# Altium PCB New_LXe_twr.PcbDoc (part 4 of 5)
Units mm, origin at the board's own origin, x right, y up, seen from the top; angles counter-clockwise.
Board outline 130 x 150 mm, 6 copper layers (Top Layer, Internal Plane 1, MidLayer1, MidLayer2, Internal Plane 2, Bottom Layer); 673 components, 504 nets, 5569 pads, 803 vias.
Unrouted connection lines stored in the file: 633.
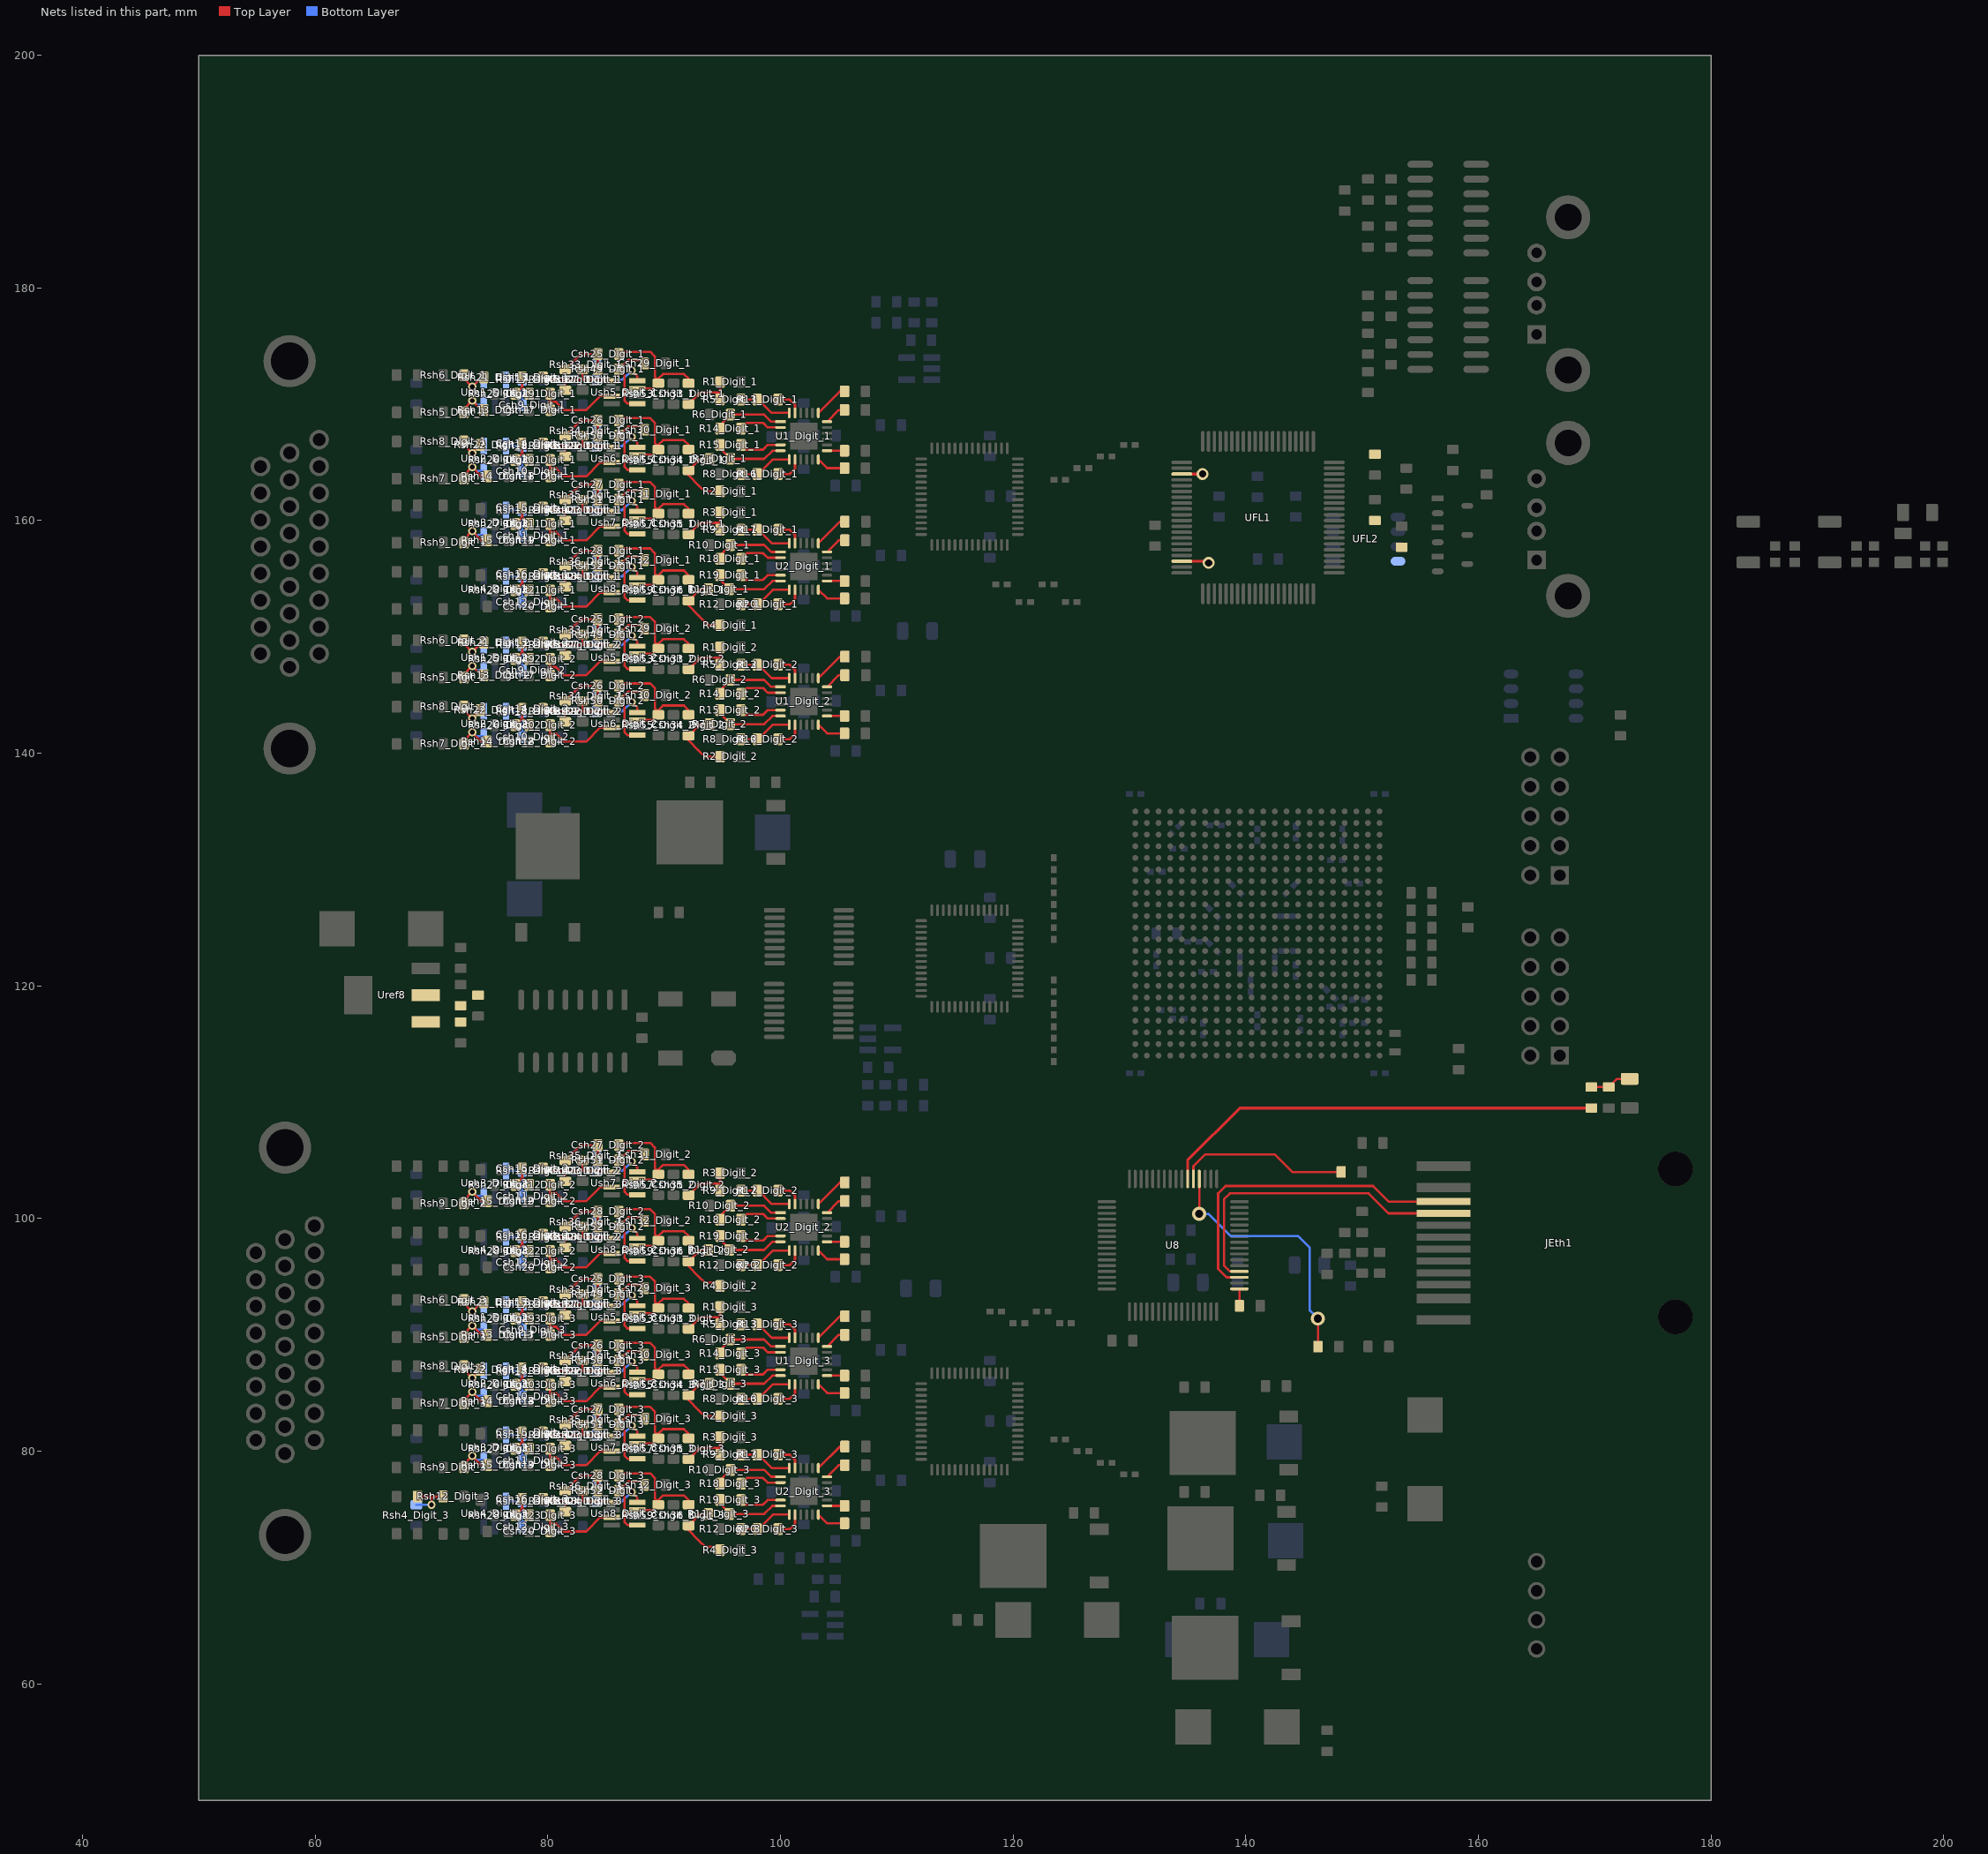
[diagram p8: the nets of this part, all layers, seen from the top]

## Via types
v1: diameter 0.5, hole 0.25, Top Layer to Bottom Layer, tented top, 430 vias
v2: diameter 0.7, hole 0.4, Top Layer to Bottom Layer, 251 vias
v3: diameter 1, hole 0.5, Top Layer to Bottom Layer, 48 vias
v4: diameter 0.6, hole 0.3, Top Layer to Bottom Layer, 31 vias
v5: diameter 1.2, hole 0.7, Top Layer to Bottom Layer, 12 vias
v6: diameter 1.016, hole 0.61, Top Layer to Bottom Layer, 9 vias
v7: diameter 1.27, hole 0.711, Top Layer to Bottom Layer, 9 vias
v8: diameter 5, hole 3, Top Layer to Bottom Layer, 6 vias
v9: diameter 0.8, hole 0.4, Top Layer to Bottom Layer, 4 vias
v10: diameter 0.6, hole 0.3, Top Layer to Bottom Layer, tented top, 2 vias
v11: diameter 1.2, hole 0.8, Top Layer to Bottom Layer, 1 vias

## Nets (pads, with @x,y where several pads share a name; then routed paths per layer and width w, separated by ;. In a path a pad name is that pad's centre, name@x,y a point inside that pad or via, vN(x,y) a via of type N, cw(c..) or ccw(c..) an arc to the next point about the centre after c; other vN are vias at no path point) (continued)
NetCsh8_Digit_3_2: Csh8_Digit_3.2 Rsh4_Digit_3.1 Rsh12_Digit_3.1 | length 4.2
  Top Layer w0.2: Csh8_Digit_3.2@68.8,76.1 Rsh12_Digit_3.1@71,76.1 ; v2(70,75.4) 70,76.1
  Bottom Layer w0.2: Rsh4_Digit_3.1@68.7,75.4 v2(70,75.4)
NetCsh9_Digit_1_1: Csh9_Digit_1.1 Rsh17_Digit_1.1 Ush1_Digit_1.5 | length 3.6
  Bottom Layer w0.2: Ush1_Digit_1.5@76.4,172.1 Rsh17_Digit_1.1@77.8,172.1 Csh9_Digit_1.1@77.8,169.9
NetCsh9_Digit_2_1: Csh9_Digit_2.1 Rsh17_Digit_2.1 Ush1_Digit_2.5 | length 3.6
  Bottom Layer w0.2: Ush1_Digit_2.5@76.4,149.3 Rsh17_Digit_2.1@77.8,149.3 Csh9_Digit_2.1@77.8,147.1
NetCsh9_Digit_3_1: Csh9_Digit_3.1 Rsh17_Digit_3.1 Ush1_Digit_3.5 | length 3.6
  Bottom Layer w0.2: Ush1_Digit_3.5@76.4,92.6 Rsh17_Digit_3.1@77.8,92.6 Csh9_Digit_3.1@77.8,90.4
NetCsh10_Digit_1_1: Csh10_Digit_1.1 Rsh18_Digit_1.1 Ush2_Digit_1.5 | length 3.6
  Bottom Layer w0.2: Ush2_Digit_1.5@76.4,166.4 Rsh18_Digit_1.1@77.8,166.4 Csh10_Digit_1.1@77.8,164.2
NetCsh10_Digit_2_1: Csh10_Digit_2.1 Rsh18_Digit_2.1 Ush2_Digit_2.5 | length 3.6
  Bottom Layer w0.2: Ush2_Digit_2.5@76.4,143.6 Rsh18_Digit_2.1@77.8,143.6 Csh10_Digit_2.1@77.8,141.4
NetCsh10_Digit_3_1: Csh10_Digit_3.1 Rsh18_Digit_3.1 Ush2_Digit_3.5 | length 3.6
  Bottom Layer w0.2: Ush2_Digit_3.5@76.4,86.9 Rsh18_Digit_3.1@77.8,86.9 Csh10_Digit_3.1@77.8,84.7
NetCsh11_Digit_1_1: Csh11_Digit_1.1 Rsh19_Digit_1.1 Ush3_Digit_1.5 | length 3.6
  Bottom Layer w0.2: Ush3_Digit_1.5@76.4,160.9 Rsh19_Digit_1.1@77.8,160.9 Csh11_Digit_1.1@77.8,158.7
NetCsh11_Digit_2_1: Csh11_Digit_2.1 Rsh19_Digit_2.1 Ush3_Digit_2.5 | length 3.6
  Bottom Layer w0.2: Ush3_Digit_2.5@76.4,104.1 Rsh19_Digit_2.1@77.8,104.1 Csh11_Digit_2.1@77.8,101.9
NetCsh11_Digit_3_1: Csh11_Digit_3.1 Rsh19_Digit_3.1 Ush3_Digit_3.5 | length 3.6
  Bottom Layer w0.2: Ush3_Digit_3.5@76.4,81.4 Rsh19_Digit_3.1@77.8,81.4 Csh11_Digit_3.1@77.8,79.2
NetCsh12_Digit_1_1: Csh12_Digit_1.1 Rsh20_Digit_1.1 Ush4_Digit_1.5 | length 3.6
  Bottom Layer w0.2: Ush4_Digit_1.5@76.4,155.2 Rsh20_Digit_1.1@77.8,155.2 Csh12_Digit_1.1@77.8,153
NetCsh12_Digit_2_1: Csh12_Digit_2.1 Rsh20_Digit_2.1 Ush4_Digit_2.5 | length 3.6
  Bottom Layer w0.2: Ush4_Digit_2.5@76.4,98.4 Rsh20_Digit_2.1@77.8,98.4 Csh12_Digit_2.1@77.8,96.2
NetCsh12_Digit_3_1: Csh12_Digit_3.1 Rsh20_Digit_3.1 Ush4_Digit_3.5 | length 3.6
  Bottom Layer w0.2: Ush4_Digit_3.5@76.4,75.7 Rsh20_Digit_3.1@77.8,75.7 Csh12_Digit_3.1@77.8,73.5
NetCsh13_Digit_1_1: Csh13_Digit_1.1 Rsh37_Digit_1.2 Rsh45_Digit_1.2 Ush5_Digit_1.1 | length 8
  Top Layer w0.2: Csh13_Digit_1.1@79.6,172.3 79.8,172.1 81.2,172.1 ; Rsh45_Digit_1.2@81.5,171.2 81.5,171.8 81.2,172.1 ; Rsh37_Digit_1.2@83,173 83,172.3 82.8,172.1 ; Ush5_Digit_1.1@85.5,172 85.4,172.1 82.8,172.1 ; 81.2,172.1 82.8,172.1
NetCsh13_Digit_1_2: Csh13_Digit_1.2 Rsh25_Digit_1.1 Rsh29_Digit_1.1 | length 2.5
  Top Layer w0.2: Rsh25_Digit_1.1@77.2,170.9 77.8,171.5 ; Csh13_Digit_1.2@77.8,172.3 77.8,171.5 ; Rsh29_Digit_1.1@78.4,170.9 77.8,171.5
NetCsh13_Digit_2_1: Csh13_Digit_2.1 Rsh37_Digit_2.2 Rsh45_Digit_2.2 Ush5_Digit_2.1 | length 8
  Top Layer w0.2: Csh13_Digit_2.1@79.6,149.5 79.8,149.3 81.2,149.3 ; Rsh45_Digit_2.2@81.5,148.4 81.5,149 81.2,149.3 ; Rsh37_Digit_2.2@83,150.2 83,149.5 82.8,149.3 ; Ush5_Digit_2.1@85.5,149.2 85.4,149.3 82.8,149.3 ; 81.2,149.3 82.8,149.3
NetCsh13_Digit_2_2: Csh13_Digit_2.2 Rsh25_Digit_2.1 Rsh29_Digit_2.1 | length 2.5
  Top Layer w0.2: Rsh25_Digit_2.1@77.2,148.1 77.8,148.7 ; Csh13_Digit_2.2@77.8,149.5 77.8,148.7 ; Rsh29_Digit_2.1@78.4,148.1 77.8,148.7
NetCsh13_Digit_3_1: Csh13_Digit_3.1 Rsh37_Digit_3.2 Rsh45_Digit_3.2 Ush5_Digit_3.1 | length 7.7
  Top Layer w0.2: Csh13_Digit_3.1@79.8,92.6 81.2,92.6 ; Rsh45_Digit_3.2@81.5,91.7 81.5,92.3 81.2,92.6 ; Rsh37_Digit_3.2@83,93.5 83,92.8 82.8,92.6 ; Ush5_Digit_3.1@85.5,92.5 85.4,92.6 82.8,92.6 ; 81.2,92.6 82.8,92.6
NetCsh13_Digit_3_2: Csh13_Digit_3.2 Rsh25_Digit_3.1 Rsh29_Digit_3.1 | length 2.5
  Top Layer w0.2: Rsh25_Digit_3.1@77.2,91.4 77.8,92 ; Csh13_Digit_3.2@77.8,92.8 77.8,92 ; Rsh29_Digit_3.1@78.4,91.4 77.8,92
NetCsh14_Digit_1_1: Csh14_Digit_1.1 Rsh39_Digit_1.2 Rsh46_Digit_1.2 Ush6_Digit_1.1 | length 8
  Top Layer w0.2: Csh14_Digit_1.1@79.6,166.6 79.8,166.4 81.2,166.4 ; Rsh46_Digit_1.2@81.5,165.5 81.5,166.1 81.2,166.4 ; Rsh39_Digit_1.2@83,167.3 83,166.6 82.8,166.4 ; Ush6_Digit_1.1@85.5,166.3 85.4,166.4 82.8,166.4 ; 81.2,166.4 82.8,166.4
NetCsh14_Digit_1_2: Csh14_Digit_1.2 Rsh26_Digit_1.1 Rsh30_Digit_1.1 | length 2.5
  Top Layer w0.2: Rsh26_Digit_1.1@77.2,165.2 77.8,165.8 ; Csh14_Digit_1.2@77.8,166.6 77.8,165.8 ; Rsh30_Digit_1.1@78.4,165.2 77.8,165.8
NetCsh14_Digit_2_1: Csh14_Digit_2.1 Rsh39_Digit_2.2 Rsh46_Digit_2.2 Ush6_Digit_2.1 | length 8
  Top Layer w0.2: Csh14_Digit_2.1@79.6,143.8 79.8,143.6 81.2,143.6 ; Rsh46_Digit_2.2@81.5,142.7 81.5,143.3 81.2,143.6 ; Rsh39_Digit_2.2@83,144.5 83,143.8 82.8,143.6 ; Ush6_Digit_2.1@85.5,143.5 85.4,143.6 82.8,143.6 ; 81.2,143.6 82.8,143.6
NetCsh14_Digit_2_2: Csh14_Digit_2.2 Rsh26_Digit_2.1 Rsh30_Digit_2.1 | length 2.5
  Top Layer w0.2: Rsh26_Digit_2.1@77.2,142.4 77.8,143 ; Csh14_Digit_2.2@77.8,143.8 77.8,143 ; Rsh30_Digit_2.1@78.4,142.4 77.8,143
NetCsh14_Digit_3_1: Csh14_Digit_3.1 Rsh39_Digit_3.2 Rsh46_Digit_3.2 Ush6_Digit_3.1 | length 7.7
  Top Layer w0.2: Csh14_Digit_3.1@79.8,86.9 81.2,86.9 ; Rsh46_Digit_3.2@81.5,86 81.5,86.6 81.2,86.9 ; Rsh39_Digit_3.2@83,87.8 83,87.1 82.8,86.9 ; Ush6_Digit_3.1@85.5,86.8 85.4,86.9 82.8,86.9 ; 81.2,86.9 82.8,86.9
NetCsh14_Digit_3_2: Csh14_Digit_3.2 Rsh26_Digit_3.1 Rsh30_Digit_3.1 | length 2.5
  Top Layer w0.2: Rsh26_Digit_3.1@77.2,85.7 77.8,86.3 ; Csh14_Digit_3.2@77.8,87.1 77.8,86.3 ; Rsh30_Digit_3.1@78.4,85.7 77.8,86.3
NetCsh15_Digit_1_1: Csh15_Digit_1.1 Rsh41_Digit_1.2 Rsh47_Digit_1.2 Ush7_Digit_1.1 | length 8
  Top Layer w0.2: Csh15_Digit_1.1@79.6,161.1 79.8,160.9 81.2,160.9 ; Rsh47_Digit_1.2@81.5,160 81.5,160.6 81.2,160.9 ; Rsh41_Digit_1.2@83,161.8 83,161.1 82.8,160.9 ; Ush7_Digit_1.1@85.5,160.8 85.4,160.9 82.8,160.9 ; 81.2,160.9 82.8,160.9
NetCsh15_Digit_1_2: Csh15_Digit_1.2 Rsh27_Digit_1.1 Rsh31_Digit_1.1 | length 2.5
  Top Layer w0.2: Rsh27_Digit_1.1@77.2,159.7 77.8,160.3 ; Csh15_Digit_1.2@77.8,161.1 77.8,160.3 ; Rsh31_Digit_1.1@78.4,159.7 77.8,160.3
NetCsh15_Digit_2_1: Csh15_Digit_2.1 Rsh41_Digit_2.2 Rsh47_Digit_2.2 Ush7_Digit_2.1 | length 8
  Top Layer w0.2: Csh15_Digit_2.1@79.6,104.3 79.8,104.1 81.2,104.1 ; Rsh47_Digit_2.2@81.5,103.2 81.5,103.8 81.2,104.1 ; Rsh41_Digit_2.2@83,105 83,104.3 82.8,104.1 ; Ush7_Digit_2.1@85.5,104 85.4,104.1 82.8,104.1 ; 81.2,104.1 82.8,104.1
NetCsh15_Digit_2_2: Csh15_Digit_2.2 Rsh27_Digit_2.1 Rsh31_Digit_2.1 | length 2.5
  Top Layer w0.2: Rsh27_Digit_2.1@77.2,102.9 77.8,103.5 ; Csh15_Digit_2.2@77.8,104.3 77.8,103.5 ; Rsh31_Digit_2.1@78.4,102.9 77.8,103.5
NetCsh15_Digit_3_1: Csh15_Digit_3.1 Rsh41_Digit_3.2 Rsh47_Digit_3.2 Ush7_Digit_3.1 | length 7.7
  Top Layer w0.2: Csh15_Digit_3.1@79.8,81.4 81.2,81.4 ; Rsh47_Digit_3.2@81.5,80.5 81.5,81.1 81.2,81.4 ; Rsh41_Digit_3.2@83,82.3 83,81.6 82.8,81.4 ; Ush7_Digit_3.1@85.5,81.3 85.4,81.4 82.8,81.4 ; 81.2,81.4 82.8,81.4
NetCsh15_Digit_3_2: Csh15_Digit_3.2 Rsh27_Digit_3.1 Rsh31_Digit_3.1 | length 2.5
  Top Layer w0.2: Rsh27_Digit_3.1@77.2,80.2 77.8,80.8 ; Csh15_Digit_3.2@77.8,81.6 77.8,80.8 ; Rsh31_Digit_3.1@78.4,80.2 77.8,80.8
NetCsh16_Digit_1_1: Csh16_Digit_1.1 Rsh43_Digit_1.2 Rsh48_Digit_1.2 Ush8_Digit_1.1 | length 8
  Top Layer w0.2: Csh16_Digit_1.1@79.6,155.4 79.8,155.2 81.2,155.2 ; Rsh48_Digit_1.2@81.5,154.3 81.5,154.9 81.2,155.2 ; Rsh43_Digit_1.2@83,156.1 83,155.4 82.8,155.2 ; Ush8_Digit_1.1@85.5,155.1 85.4,155.2 82.8,155.2 ; 81.2,155.2 82.8,155.2
NetCsh16_Digit_1_2: Csh16_Digit_1.2 Rsh28_Digit_1.1 Rsh32_Digit_1.1 | length 2.5
  Top Layer w0.2: Rsh28_Digit_1.1@77.2,154 77.8,154.6 ; Csh16_Digit_1.2@77.8,155.4 77.8,154.6 ; Rsh32_Digit_1.1@78.4,154 77.8,154.6
NetCsh16_Digit_2_1: Csh16_Digit_2.1 Rsh43_Digit_2.2 Rsh48_Digit_2.2 Ush8_Digit_2.1 | length 8
  Top Layer w0.2: Csh16_Digit_2.1@79.6,98.6 79.8,98.4 81.2,98.4 ; Rsh48_Digit_2.2@81.5,97.5 81.5,98.1 81.2,98.4 ; Rsh43_Digit_2.2@83,99.3 83,98.6 82.8,98.4 ; Ush8_Digit_2.1@85.5,98.3 85.4,98.4 82.8,98.4 ; 81.2,98.4 82.8,98.4
NetCsh16_Digit_2_2: Csh16_Digit_2.2 Rsh28_Digit_2.1 Rsh32_Digit_2.1 | length 2.5
  Top Layer w0.2: Rsh28_Digit_2.1@77.2,97.2 77.8,97.8 ; Csh16_Digit_2.2@77.8,98.6 77.8,97.8 ; Rsh32_Digit_2.1@78.4,97.2 77.8,97.8
NetCsh16_Digit_3_1: Csh16_Digit_3.1 Rsh43_Digit_3.2 Rsh48_Digit_3.2 Ush8_Digit_3.1 | length 7.7
  Top Layer w0.2: Csh16_Digit_3.1@79.8,75.7 81.2,75.7 ; Rsh48_Digit_3.2@81.5,74.8 81.5,75.4 81.2,75.7 ; Rsh43_Digit_3.2@83,76.6 83,75.9 82.8,75.7 ; Ush8_Digit_3.1@85.5,75.6 85.4,75.7 82.8,75.7 ; 81.2,75.7 82.8,75.7
NetCsh16_Digit_3_2: Csh16_Digit_3.2 Rsh28_Digit_3.1 Rsh32_Digit_3.1 | length 2.5
  Top Layer w0.2: Rsh28_Digit_3.1@77.2,74.5 77.8,75.1 ; Csh16_Digit_3.2@77.8,75.9 77.8,75.1 ; Rsh32_Digit_3.1@78.4,74.5 77.8,75.1
NetCsh17_Digit_1_1: Csh17_Digit_1.1 Rsh29_Digit_1.2 Ush5_Digit_1.3 | length 7.8
  Top Layer w0.2: Csh17_Digit_1.1@80.2,169.144 Csh17_Digit_1.1@80.2,169.5 Csh17_Digit_1.1@80.2,169.856 80.2,170.2 ; Rsh29_Digit_1.2@80.2,170.9 Rsh29_Digit_1.2@80.2,170.544 80.2,170.2 ; Ush5_Digit_1.3@85.5,170.7 84.5,170.7 83.3,169.5 81.4,169.5 80.7,170.2 80.2,170.2
NetCsh17_Digit_2_1: Csh17_Digit_2.1 Rsh29_Digit_2.2 Ush5_Digit_2.3 | length 7.8
  Top Layer w0.2: Csh17_Digit_2.1@80.2,146.344 Csh17_Digit_2.1@80.2,146.7 Csh17_Digit_2.1@80.2,147.056 80.2,147.4 ; Rsh29_Digit_2.2@80.2,148.1 Rsh29_Digit_2.2@80.2,147.744 80.2,147.4 ; Ush5_Digit_2.3@85.5,147.9 84.5,147.9 83.3,146.7 81.4,146.7 80.7,147.4 80.2,147.4
NetCsh17_Digit_3_1: Csh17_Digit_3.1 Rsh29_Digit_3.2 Ush5_Digit_3.3 | length 6.8
  Top Layer w0.2: Csh17_Digit_3.1@80.2,90.356 80.2,90.7 ; Rsh29_Digit_3.2@80.2,91.044 80.2,90.7 ; Ush5_Digit_3.3@85.5,91.2 84.5,91.2 83.3,90 81.4,90 80.7,90.7 80.2,90.7
NetCsh18_Digit_1_1: Csh18_Digit_1.1 Rsh30_Digit_1.2 Ush6_Digit_1.3 | length 7.8
  Top Layer w0.2: Csh18_Digit_1.1@80.2,163.444 Csh18_Digit_1.1@80.2,163.8 Csh18_Digit_1.1@80.2,164.156 80.2,164.5 ; Rsh30_Digit_1.2@80.2,165.2 80.2,164.5 ; Ush6_Digit_1.3@85.5,165 84.5,165 83.3,163.8 81.4,163.8 80.7,164.5 80.2,164.5
NetCsh18_Digit_2_1: Csh18_Digit_2.1 Rsh30_Digit_2.2 Ush6_Digit_2.3 | length 7.8
  Top Layer w0.2: Csh18_Digit_2.1@80.2,140.644 Csh18_Digit_2.1@80.2,141 Csh18_Digit_2.1@80.2,141.356 80.2,141.7 ; Rsh30_Digit_2.2@80.2,142.4 80.2,141.7 ; Ush6_Digit_2.3@85.5,142.2 84.5,142.2 83.3,141 81.4,141 80.7,141.7 80.2,141.7
NetCsh18_Digit_3_1: Csh18_Digit_3.1 Rsh30_Digit_3.2 Ush6_Digit_3.3 | length 7.1
  Top Layer w0.2: Csh18_Digit_3.1@80.2,84.656 80.2,85 ; Rsh30_Digit_3.2@80.2,85.7 80.2,85 ; Ush6_Digit_3.3@85.5,85.5 84.5,85.5 83.3,84.3 81.4,84.3 80.7,85 80.2,85
NetCsh19_Digit_1_1: Csh19_Digit_1.1 Rsh31_Digit_1.2 Ush7_Digit_1.3 | length 7.8
  Top Layer w0.2: Csh19_Digit_1.1@80.2,157.944 Csh19_Digit_1.1@80.2,158.3 Csh19_Digit_1.1@80.2,158.656 80.2,159 ; Rsh31_Digit_1.2@80.2,159.7 Rsh31_Digit_1.2@80.2,159.344 80.2,159 ; Ush7_Digit_1.3@85.5,159.5 84.5,159.5 83.3,158.3 81.4,158.3 80.7,159 80.2,159
NetCsh19_Digit_2_1: Csh19_Digit_2.1 Rsh31_Digit_2.2 Ush7_Digit_2.3 | length 7.8
  Top Layer w0.2: Csh19_Digit_2.1@80.2,101.144 Csh19_Digit_2.1@80.2,101.5 Csh19_Digit_2.1@80.2,101.856 80.2,102.2 ; Rsh31_Digit_2.2@80.2,102.9 Rsh31_Digit_2.2@80.2,102.544 80.2,102.2 ; Ush7_Digit_2.3@85.5,102.7 84.5,102.7 83.3,101.5 81.4,101.5 80.7,102.2 80.2,102.2
NetCsh19_Digit_3_1: Csh19_Digit_3.1 Rsh31_Digit_3.2 Ush7_Digit_3.3 | length 7.1
  Top Layer w0.2: Csh19_Digit_3.1@80.2,78.8 Csh19_Digit_3.1@80.2,79.156 80.2,79.5 ; Rsh31_Digit_3.2@80.2,79.844 80.2,79.5 ; Ush7_Digit_3.3@85.5,80 84.5,80 83.3,78.8 81.4,78.8 80.7,79.5 80.2,79.5
NetCsh20_Digit_1_1: Csh20_Digit_1.1 Rsh32_Digit_1.2 Ush8_Digit_1.3 | length 7.8
  Top Layer w0.2: Csh20_Digit_1.1@80.2,152.244 Csh20_Digit_1.1@80.2,152.6 Csh20_Digit_1.1@80.2,152.956 80.2,153.3 ; Rsh32_Digit_1.2@80.2,154 Rsh32_Digit_1.2@80.2,153.644 80.2,153.3 ; Ush8_Digit_1.3@85.5,153.8 84.5,153.8 83.3,152.6 81.4,152.6 80.7,153.3 80.2,153.3
NetCsh20_Digit_2_1: Csh20_Digit_2.1 Rsh32_Digit_2.2 Ush8_Digit_2.3 | length 7.8
  Top Layer w0.2: Csh20_Digit_2.1@80.2,95.444 Csh20_Digit_2.1@80.2,95.8 Csh20_Digit_2.1@80.2,96.156 80.2,96.5 ; Rsh32_Digit_2.2@80.2,97.2 Rsh32_Digit_2.2@80.2,96.844 80.2,96.5 ; Ush8_Digit_2.3@85.5,97 84.5,97 83.3,95.8 81.4,95.8 80.7,96.5 80.2,96.5
NetCsh20_Digit_3_1: Csh20_Digit_3.1 Rsh32_Digit_3.2 Ush8_Digit_3.3 | length 7.1
  Top Layer w0.2: Csh20_Digit_3.1@80.2,73.1 Csh20_Digit_3.1@80.2,73.456 80.2,73.8 ; Rsh32_Digit_3.2@80.2,74.144 80.2,73.8 ; Ush8_Digit_3.3@85.5,74.3 84.5,74.3 83.3,73.1 81.4,73.1 80.7,73.8 80.2,73.8
NetCsh21_Digit_1_1: Csh21_Digit_1.1 Rsh33_Digit_1.1 Ush5_Digit_1.8 | length 5.7
  Top Layer w0.2: v2(87.2,172.9) 87.7,172.4 Ush5_Digit_1.8@87.7,172
  Bottom Layer w0.2: Rsh33_Digit_1.1@84.2,173.4 Csh21_Digit_1.1@84.2,172.1 86.4,172.1 v2(87.2,172.9)
NetCsh21_Digit_2_1: Csh21_Digit_2.1 Rsh33_Digit_2.1 Ush5_Digit_2.8 | length 5.7
  Top Layer w0.2: v2(87.2,150.1) 87.7,149.6 Ush5_Digit_2.8@87.7,149.2
  Bottom Layer w0.2: Rsh33_Digit_2.1@84.2,150.6 Csh21_Digit_2.1@84.2,149.3 86.4,149.3 v2(87.2,150.1)
NetCsh21_Digit_3_1: Csh21_Digit_3.1 Rsh33_Digit_3.1 Ush5_Digit_3.8 | length 5.7
  Top Layer w0.2: v2(87.2,93.4) 87.7,92.9 Ush5_Digit_3.8@87.7,92.5
  Bottom Layer w0.2: Rsh33_Digit_3.1@84.2,93.9 Csh21_Digit_3.1@84.2,92.6 86.4,92.6 v2(87.2,93.4)
NetCsh22_Digit_1_1: Csh22_Digit_1.1 Rsh34_Digit_1.1 Ush6_Digit_1.8 | length 5.7
  Top Layer w0.2: v2(87.2,167.2) 87.7,166.7 Ush6_Digit_1.8@87.7,166.3
  Bottom Layer w0.2: Rsh34_Digit_1.1@84.2,167.7 Csh22_Digit_1.1@84.2,166.4 86.4,166.4 v2(87.2,167.2)
NetCsh22_Digit_2_1: Csh22_Digit_2.1 Rsh34_Digit_2.1 Ush6_Digit_2.8 | length 5.7
  Top Layer w0.2: v2(87.2,144.4) 87.7,143.9 Ush6_Digit_2.8@87.7,143.5
  Bottom Layer w0.2: Rsh34_Digit_2.1@84.2,144.9 Csh22_Digit_2.1@84.2,143.6 86.4,143.6 v2(87.2,144.4)
NetCsh22_Digit_3_1: Csh22_Digit_3.1 Rsh34_Digit_3.1 Ush6_Digit_3.8 | length 5.7
  Top Layer w0.2: v2(87.2,87.7) 87.7,87.2 Ush6_Digit_3.8@87.7,86.8
  Bottom Layer w0.2: Rsh34_Digit_3.1@84.2,88.2 Csh22_Digit_3.1@84.2,86.9 86.4,86.9 v2(87.2,87.7)
NetCsh23_Digit_1_1: Csh23_Digit_1.1 Rsh35_Digit_1.1 Ush7_Digit_1.8 | length 5.7
  Top Layer w0.2: v2(87.2,161.7) 87.7,161.2 Ush7_Digit_1.8@87.7,160.8
  Bottom Layer w0.2: Rsh35_Digit_1.1@84.2,162.2 Csh23_Digit_1.1@84.2,160.9 86.4,160.9 v2(87.2,161.7)
NetCsh23_Digit_2_1: Csh23_Digit_2.1 Rsh35_Digit_2.1 Ush7_Digit_2.8 | length 5.7
  Top Layer w0.2: v2(87.2,104.9) 87.7,104.4 Ush7_Digit_2.8@87.7,104
  Bottom Layer w0.2: Rsh35_Digit_2.1@84.2,105.4 Csh23_Digit_2.1@84.2,104.1 86.4,104.1 v2(87.2,104.9)
NetCsh23_Digit_3_1: Csh23_Digit_3.1 Rsh35_Digit_3.1 Ush7_Digit_3.8 | length 5.7
  Top Layer w0.2: v2(87.2,82.2) 87.7,81.7 Ush7_Digit_3.8@87.7,81.3
  Bottom Layer w0.2: Rsh35_Digit_3.1@84.2,82.7 Csh23_Digit_3.1@84.2,81.4 86.4,81.4 v2(87.2,82.2)
NetCsh24_Digit_1_1: Csh24_Digit_1.1 Rsh36_Digit_1.1 Ush8_Digit_1.8 | length 5.7
  Top Layer w0.2: v2(87.2,156) 87.7,155.5 Ush8_Digit_1.8@87.7,155.1
  Bottom Layer w0.2: Rsh36_Digit_1.1@84.2,156.5 Csh24_Digit_1.1@84.2,155.2 86.4,155.2 v2(87.2,156)
NetCsh24_Digit_2_1: Csh24_Digit_2.1 Rsh36_Digit_2.1 Ush8_Digit_2.8 | length 5.7
  Top Layer w0.2: v2(87.2,99.2) 87.7,98.7 Ush8_Digit_2.8@87.7,98.3
  Bottom Layer w0.2: Rsh36_Digit_2.1@84.2,99.7 Csh24_Digit_2.1@84.2,98.4 86.4,98.4 v2(87.2,99.2)
NetCsh24_Digit_3_1: Csh24_Digit_3.1 Rsh36_Digit_3.1 Ush8_Digit_3.8 | length 5.7
  Top Layer w0.2: v2(87.2,76.5) 87.7,76 Ush8_Digit_3.8@87.7,75.6
  Bottom Layer w0.2: Rsh36_Digit_3.1@84.2,77 Csh24_Digit_3.1@84.2,75.7 86.4,75.7 v2(87.2,76.5)
NetCsh25_Digit_1_1: Csh25_Digit_1.1 Csh33_Digit_1.1 Rsh53_Digit_1.2 Ush5_Digit_1.7 | length 11.2
  Top Layer w0.2: Csh25_Digit_1.1@86.1,174.3 86.3,174.5 88.8,174.5 89.2,174.1 89.2,172.354 Rsh53_Digit_1.2@89.5,172.054 ; Ush5_Digit_1.7@87.7,171.35 89.05,171.35 Rsh53_Digit_1.2@89.5,171.8 Rsh53_Digit_1.2@89.5,172.054 ; Csh33_Digit_1.1@92.1,171.8 92.1,172.2 91.7,172.6 89.9,172.6 89.5,172.2 Rsh53_Digit_1.2@89.5,172.054
NetCsh25_Digit_1_2: Csh25_Digit_1.2 Rsh45_Digit_1.1 Rsh49_Digit_1.1 | length 3.9
  Top Layer w0.2: Rsh45_Digit_1.1@81.5,173 82.8,174.3 Csh25_Digit_1.2@83.944,174.3 ; Rsh49_Digit_1.1@84.3,173.356 Csh25_Digit_1.2@84.3,174.3
NetCsh25_Digit_2_1: Csh25_Digit_2.1 Csh33_Digit_2.1 Rsh53_Digit_2.2 Ush5_Digit_2.7 | length 11.2
  Top Layer w0.2: Csh25_Digit_2.1@86.1,151.5 86.3,151.7 88.8,151.7 89.2,151.3 89.2,149.554 Rsh53_Digit_2.2@89.5,149.254 ; Ush5_Digit_2.7@87.7,148.55 89.05,148.55 Rsh53_Digit_2.2@89.5,149 Rsh53_Digit_2.2@89.5,149.254 ; Csh33_Digit_2.1@92.1,149 92.1,149.4 91.7,149.8 89.9,149.8 89.5,149.4 Rsh53_Digit_2.2@89.5,149.254
NetCsh25_Digit_2_2: Csh25_Digit_2.2 Rsh45_Digit_2.1 Rsh49_Digit_2.1 | length 3.9
  Top Layer w0.2: Rsh45_Digit_2.1@81.5,150.2 82.8,151.5 Csh25_Digit_2.2@83.944,151.5 ; Rsh49_Digit_2.1@84.3,150.556 Csh25_Digit_2.2@84.3,151.5
NetCsh25_Digit_3_1: Csh25_Digit_3.1 Csh33_Digit_3.1 Rsh53_Digit_3.2 Ush5_Digit_3.7 | length 11
  Top Layer w0.2: Csh25_Digit_3.1@86.3,95 88.8,95 89.2,94.6 89.2,92.854 Rsh53_Digit_3.2@89.5,92.554 ; Ush5_Digit_3.7@87.7,91.85 89.05,91.85 Rsh53_Digit_3.2@89.5,92.3 Rsh53_Digit_3.2@89.5,92.554 ; Csh33_Digit_3.1@92.1,92.3 92.1,92.7 91.7,93.1 89.9,93.1 89.5,92.7 Rsh53_Digit_3.2@89.5,92.554
NetCsh25_Digit_3_2: Csh25_Digit_3.2 Rsh45_Digit_3.1 Rsh49_Digit_3.1 | length 4.3
  Top Layer w0.2: Rsh45_Digit_3.1@81.5,93.5 82.8,94.8 Csh25_Digit_3.2@83.944,94.8 ; Rsh49_Digit_3.1@84.3,93.5 Csh25_Digit_3.2@84.3,94.8
NetCsh26_Digit_1_1: Csh26_Digit_1.1 Csh34_Digit_1.1 Rsh55_Digit_1.2 Ush6_Digit_1.7 | length 11.2
  Top Layer w0.2: Csh26_Digit_1.1@86.1,168.6 86.3,168.8 88.8,168.8 89.2,168.4 89.2,166.654 Rsh55_Digit_1.2@89.5,166.354 ; Ush6_Digit_1.7@87.7,165.65 89.05,165.65 Rsh55_Digit_1.2@89.5,166.1 Rsh55_Digit_1.2@89.5,166.354 ; Csh34_Digit_1.1@92.1,166.1 92.1,166.5 91.7,166.9 89.9,166.9 89.5,166.5 Rsh55_Digit_1.2@89.5,166.354
NetCsh26_Digit_1_2: Csh26_Digit_1.2 Rsh46_Digit_1.1 Rsh50_Digit_1.1 | length 3.9
  Top Layer w0.2: Rsh46_Digit_1.1@81.5,167.3 82.8,168.6 Csh26_Digit_1.2@83.944,168.6 ; Rsh50_Digit_1.1@84.3,167.656 Csh26_Digit_1.2@84.3,168.6
NetCsh26_Digit_2_1: Csh26_Digit_2.1 Csh34_Digit_2.1 Rsh55_Digit_2.2 Ush6_Digit_2.7 | length 11.2
  Top Layer w0.2: Csh26_Digit_2.1@86.1,145.8 86.3,146 88.8,146 89.2,145.6 89.2,143.854 Rsh55_Digit_2.2@89.5,143.554 ; Ush6_Digit_2.7@87.7,142.85 89.05,142.85 Rsh55_Digit_2.2@89.5,143.3 Rsh55_Digit_2.2@89.5,143.554 ; Csh34_Digit_2.1@92.1,143.3 92.1,143.7 91.7,144.1 89.9,144.1 89.5,143.7 Rsh55_Digit_2.2@89.5,143.554
NetCsh26_Digit_2_2: Csh26_Digit_2.2 Rsh46_Digit_2.1 Rsh50_Digit_2.1 | length 3.9
  Top Layer w0.2: Rsh46_Digit_2.1@81.5,144.5 82.8,145.8 Csh26_Digit_2.2@83.944,145.8 ; Rsh50_Digit_2.1@84.3,144.856 Csh26_Digit_2.2@84.3,145.8
NetCsh26_Digit_3_1: Csh26_Digit_3.1 Csh34_Digit_3.1 Rsh55_Digit_3.2 Ush6_Digit_3.7 | length 11
  Top Layer w0.2: Csh26_Digit_3.1@86.3,89.3 88.8,89.3 89.2,88.9 89.2,87.154 Rsh55_Digit_3.2@89.5,86.854 ; Ush6_Digit_3.7@87.7,86.15 89.05,86.15 Rsh55_Digit_3.2@89.5,86.6 Rsh55_Digit_3.2@89.5,86.854 ; Csh34_Digit_3.1@92.1,86.6 92.1,87 91.7,87.4 89.9,87.4 89.5,87 Rsh55_Digit_3.2@89.5,86.854
NetCsh26_Digit_3_2: Csh26_Digit_3.2 Rsh46_Digit_3.1 Rsh50_Digit_3.1 | length 4.3
  Top Layer w0.2: Rsh46_Digit_3.1@81.5,87.8 82.8,89.1 Csh26_Digit_3.2@83.944,89.1 ; Rsh50_Digit_3.1@84.3,87.8 Csh26_Digit_3.2@84.3,89.1
NetCsh27_Digit_1_1: Csh27_Digit_1.1 Csh35_Digit_1.1 Rsh57_Digit_1.2 Ush7_Digit_1.7 | length 11.2
  Top Layer w0.2: Csh27_Digit_1.1@86.1,163.1 86.3,163.3 88.8,163.3 89.2,162.9 89.2,161.154 Rsh57_Digit_1.2@89.5,160.854 ; Ush7_Digit_1.7@87.7,160.15 89.05,160.15 Rsh57_Digit_1.2@89.5,160.6 Rsh57_Digit_1.2@89.5,160.854 ; Csh35_Digit_1.1@92.1,160.6 92.1,161 91.7,161.4 89.9,161.4 89.5,161 Rsh57_Digit_1.2@89.5,160.854
NetCsh27_Digit_1_2: Csh27_Digit_1.2 Rsh47_Digit_1.1 Rsh51_Digit_1.1 | length 3.9
  Top Layer w0.2: Rsh47_Digit_1.1@81.5,161.8 82.8,163.1 Csh27_Digit_1.2@83.944,163.1 ; Rsh51_Digit_1.1@84.3,162.156 Csh27_Digit_1.2@84.3,163.1
NetCsh27_Digit_2_1: Csh27_Digit_2.1 Csh35_Digit_2.1 Rsh57_Digit_2.2 Ush7_Digit_2.7 | length 11.2
  Top Layer w0.2: Csh27_Digit_2.1@86.1,106.3 86.3,106.5 88.8,106.5 89.2,106.1 89.2,104.354 Rsh57_Digit_2.2@89.5,104.054 ; Ush7_Digit_2.7@87.7,103.35 89.05,103.35 Rsh57_Digit_2.2@89.5,103.8 Rsh57_Digit_2.2@89.5,104.054 ; Csh35_Digit_2.1@92.1,103.8 92.1,104.2 91.7,104.6 89.9,104.6 89.5,104.2 Rsh57_Digit_2.2@89.5,104.054
NetCsh27_Digit_2_2: Csh27_Digit_2.2 Rsh47_Digit_2.1 Rsh51_Digit_2.1 | length 3.9
  Top Layer w0.2: Rsh47_Digit_2.1@81.5,105 82.8,106.3 Csh27_Digit_2.2@83.944,106.3 ; Rsh51_Digit_2.1@84.3,105.356 Csh27_Digit_2.2@84.3,106.3
NetCsh27_Digit_3_1: Csh27_Digit_3.1 Csh35_Digit_3.1 Rsh57_Digit_3.2 Ush7_Digit_3.7 | length 11
  Top Layer w0.2: Csh27_Digit_3.1@86.3,83.8 88.8,83.8 89.2,83.4 89.2,81.654 Rsh57_Digit_3.2@89.5,81.354 ; Ush7_Digit_3.7@87.7,80.65 89.05,80.65 Rsh57_Digit_3.2@89.5,81.1 Rsh57_Digit_3.2@89.5,81.354 ; Csh35_Digit_3.1@92.1,81.1 92.1,81.5 91.7,81.9 89.9,81.9 89.5,81.5 Rsh57_Digit_3.2@89.5,81.354
NetCsh27_Digit_3_2: Csh27_Digit_3.2 Rsh47_Digit_3.1 Rsh51_Digit_3.1 | length 4.3
  Top Layer w0.2: Rsh47_Digit_3.1@81.5,82.3 82.8,83.6 Csh27_Digit_3.2@83.944,83.6 ; Rsh51_Digit_3.1@84.3,82.3 Csh27_Digit_3.2@84.3,83.6
NetCsh28_Digit_1_1: Csh28_Digit_1.1 Csh36_Digit_1.1 Rsh59_Digit_1.2 Ush8_Digit_1.7 | length 11.2
  Top Layer w0.2: Csh28_Digit_1.1@86.1,157.4 86.3,157.6 88.8,157.6 89.2,157.2 89.2,155.454 Rsh59_Digit_1.2@89.5,155.154 ; Ush8_Digit_1.7@87.7,154.45 89.05,154.45 Rsh59_Digit_1.2@89.5,154.9 Rsh59_Digit_1.2@89.5,155.154 ; Csh36_Digit_1.1@92.1,154.9 92.1,155.3 91.7,155.7 89.9,155.7 89.5,155.3 Rsh59_Digit_1.2@89.5,155.154
NetCsh28_Digit_1_2: Csh28_Digit_1.2 Rsh48_Digit_1.1 Rsh52_Digit_1.1 | length 3.9
  Top Layer w0.2: Rsh48_Digit_1.1@81.5,156.1 82.8,157.4 Csh28_Digit_1.2@83.944,157.4 ; Rsh52_Digit_1.1@84.3,156.456 Csh28_Digit_1.2@84.3,157.4
NetCsh28_Digit_2_1: Csh28_Digit_2.1 Csh36_Digit_2.1 Rsh59_Digit_2.2 Ush8_Digit_2.7 | length 11.2
  Top Layer w0.2: Csh28_Digit_2.1@86.1,100.6 86.3,100.8 88.8,100.8 89.2,100.4 89.2,98.654 Rsh59_Digit_2.2@89.5,98.354 ; Ush8_Digit_2.7@87.7,97.65 89.05,97.65 Rsh59_Digit_2.2@89.5,98.1 Rsh59_Digit_2.2@89.5,98.354 ; Csh36_Digit_2.1@92.1,98.1 92.1,98.5 91.7,98.9 89.9,98.9 89.5,98.5 Rsh59_Digit_2.2@89.5,98.354
NetCsh28_Digit_2_2: Csh28_Digit_2.2 Rsh48_Digit_2.1 Rsh52_Digit_2.1 | length 4.3
  Top Layer w0.2: Rsh48_Digit_2.1@81.5,99.3 82.8,100.6 Csh28_Digit_2.2@83.944,100.6 ; Rsh52_Digit_2.1@84.3,99.3 Csh28_Digit_2.2@84.3,100.6
NetCsh28_Digit_3_1: Csh28_Digit_3.1 Csh36_Digit_3.1 Rsh59_Digit_3.2 Ush8_Digit_3.7 | length 11
  Top Layer w0.2: Csh28_Digit_3.1@86.3,78.1 88.8,78.1 89.2,77.7 89.2,75.954 Rsh59_Digit_3.2@89.5,75.654 ; Ush8_Digit_3.7@87.7,74.95 89.05,74.95 Rsh59_Digit_3.2@89.5,75.4 Rsh59_Digit_3.2@89.5,75.654 ; Csh36_Digit_3.1@92.1,75.4 92.1,75.8 91.7,76.2 89.9,76.2 89.5,75.8 Rsh59_Digit_3.2@89.5,75.654
NetCsh28_Digit_3_2: Csh28_Digit_3.2 Rsh48_Digit_3.1 Rsh52_Digit_3.1 | length 4.3
  Top Layer w0.2: Rsh48_Digit_3.1@81.5,76.6 82.8,77.9 Csh28_Digit_3.2@83.944,77.9 ; Rsh52_Digit_3.1@84.3,76.6 Csh28_Digit_3.2@84.3,77.9
NetCsh29_Digit_1_1: Csh29_Digit_1.1 Rsh49_Digit_1.2 Ush5_Digit_1.5 | length 6.8
  Top Layer w0.2: Ush5_Digit_1.5@87.7,170.05 86.85,170.05 86.6,170.3 86.6,172.5 Rsh49_Digit_1.2@86.1,173 86.9,173.8 88,173.8 Csh29_Digit_1.1@88.3,173.5
NetCsh29_Digit_2_1: Csh29_Digit_2.1 Rsh49_Digit_2.2 Ush5_Digit_2.5 | length 6.8
  Top Layer w0.2: Ush5_Digit_2.5@87.7,147.25 86.85,147.25 86.6,147.5 86.6,149.7 Rsh49_Digit_2.2@86.1,150.2 86.9,151 88,151 Csh29_Digit_2.1@88.3,150.7
NetCsh29_Digit_3_1: Csh29_Digit_3.1 Rsh49_Digit_3.2 Ush5_Digit_3.5 | length 6.8
  Top Layer w0.2: Ush5_Digit_3.5@87.7,90.55 86.85,90.55 86.6,90.8 86.6,93 Rsh49_Digit_3.2@86.1,93.5 86.9,94.3 88,94.3 Csh29_Digit_3.1@88.3,94
NetCsh30_Digit_1_1: Csh30_Digit_1.1 Rsh50_Digit_1.2 Ush6_Digit_1.5 | length 6.8
  Top Layer w0.2: Ush6_Digit_1.5@87.7,164.35 86.85,164.35 86.6,164.6 86.6,166.8 Rsh50_Digit_1.2@86.1,167.3 86.9,168.1 88,168.1 Csh30_Digit_1.1@88.3,167.8
NetCsh30_Digit_2_1: Csh30_Digit_2.1 Rsh50_Digit_2.2 Ush6_Digit_2.5 | length 6.8
  Top Layer w0.2: Ush6_Digit_2.5@87.7,141.55 86.85,141.55 86.6,141.8 86.6,144 Rsh50_Digit_2.2@86.1,144.5 86.9,145.3 88,145.3 Csh30_Digit_2.1@88.3,145
NetCsh30_Digit_3_1: Csh30_Digit_3.1 Rsh50_Digit_3.2 Ush6_Digit_3.5 | length 6.8
  Top Layer w0.2: Ush6_Digit_3.5@87.7,84.85 86.85,84.85 86.6,85.1 86.6,87.3 Rsh50_Digit_3.2@86.1,87.8 86.9,88.6 88,88.6 Csh30_Digit_3.1@88.3,88.3
NetCsh31_Digit_1_1: Csh31_Digit_1.1 Rsh51_Digit_1.2 Ush7_Digit_1.5 | length 6.8
  Top Layer w0.2: Ush7_Digit_1.5@87.7,158.85 86.85,158.85 86.6,159.1 86.6,161.3 Rsh51_Digit_1.2@86.1,161.8 86.9,162.6 88,162.6 Csh31_Digit_1.1@88.3,162.3
NetCsh31_Digit_2_1: Csh31_Digit_2.1 Rsh51_Digit_2.2 Ush7_Digit_2.5 | length 6.8
  Top Layer w0.2: Ush7_Digit_2.5@87.7,102.05 86.85,102.05 86.6,102.3 86.6,104.5 Rsh51_Digit_2.2@86.1,105 86.9,105.8 88,105.8 Csh31_Digit_2.1@88.3,105.5
NetCsh31_Digit_3_1: Csh31_Digit_3.1 Rsh51_Digit_3.2 Ush7_Digit_3.5 | length 6.8
  Top Layer w0.2: Ush7_Digit_3.5@87.7,79.35 86.85,79.35 86.6,79.6 86.6,81.8 Rsh51_Digit_3.2@86.1,82.3 86.9,83.1 88,83.1 Csh31_Digit_3.1@88.3,82.8
NetCsh32_Digit_1_1: Csh32_Digit_1.1 Rsh52_Digit_1.2 Ush8_Digit_1.5 | length 6.8
  Top Layer w0.2: Ush8_Digit_1.5@87.7,153.15 86.85,153.15 86.6,153.4 86.6,155.6 Rsh52_Digit_1.2@86.1,156.1 86.9,156.9 88,156.9 Csh32_Digit_1.1@88.3,156.6
NetCsh32_Digit_2_1: Csh32_Digit_2.1 Rsh52_Digit_2.2 Ush8_Digit_2.5 | length 6.8
  Top Layer w0.2: Ush8_Digit_2.5@87.7,96.35 86.85,96.35 86.6,96.6 86.6,98.8 Rsh52_Digit_2.2@86.1,99.3 86.9,100.1 88,100.1 Csh32_Digit_2.1@88.3,99.8
NetCsh32_Digit_3_1: Csh32_Digit_3.1 Rsh52_Digit_3.2 Ush8_Digit_3.5 | length 6.8
  Top Layer w0.2: Ush8_Digit_3.5@87.7,73.65 86.85,73.65 86.6,73.9 86.6,76.1 Rsh52_Digit_3.2@86.1,76.6 86.9,77.4 88,77.4 Csh32_Digit_3.1@88.3,77.1
NetCsh33_Digit_1_2: Csh33_Digit_1.2 R1_Digit_1.1 R5_Digit_1.2 | length 4.6
  Top Layer w0.2: Csh33_Digit_1.2@92.1,170 93.1,171 93.5,171 94.8,171 ; R5_Digit_1.2@94.8,170.4 94.8,171 ; R1_Digit_1.1@94.8,171.9 R1_Digit_1.1@94.8,171.544 94.8,171
NetCsh33_Digit_2_2: Csh33_Digit_2.2 R1_Digit_2.1 R5_Digit_2.2 | length 4.6
  Top Layer w0.2: Csh33_Digit_2.2@92.1,147.2 93.1,148.2 93.5,148.2 94.8,148.2 ; R5_Digit_2.2@94.8,147.6 94.8,148.2 ; R1_Digit_2.1@94.8,149.1 R1_Digit_2.1@94.8,148.744 94.8,148.2
NetCsh33_Digit_3_2: Csh33_Digit_3.2 R1_Digit_3.1 R5_Digit_3.2 | length 4.6
  Top Layer w0.2: Csh33_Digit_3.2@92.1,90.5 93.1,91.5 94.8,91.5 ; R5_Digit_3.2@94.8,90.9 94.8,91.5 ; R1_Digit_3.1@94.8,92.4 94.8,91.5
NetCsh34_Digit_1_2: Csh34_Digit_1.2 R2_Digit_1.1 R7_Digit_1.2 | length 5.9
  Top Layer w0.2: R7_Digit_1.2@93.9,165.3 R7_Digit_1.2@93.646,165.3 93.1,165.3 Csh34_Digit_1.2@92.1,164.3 Csh34_Digit_1.2@92.1,164.046 92.1,163.9 93,163 93.5,162.5 R2_Digit_1.1@94.546,162.5 R2_Digit_1.1@94.8,162.5
NetCsh34_Digit_2_2: Csh34_Digit_2.2 R2_Digit_2.1 R7_Digit_2.2 | length 5.9
  Top Layer w0.2: R7_Digit_2.2@93.9,142.5 R7_Digit_2.2@93.646,142.5 93.1,142.5 Csh34_Digit_2.2@92.1,141.5 Csh34_Digit_2.2@92.1,141.246 92.1,141.1 93,140.2 93.5,139.7 R2_Digit_2.1@94.546,139.7 R2_Digit_2.1@94.8,139.7
NetCsh34_Digit_3_2: Csh34_Digit_3.2 R2_Digit_3.1 R7_Digit_3.2 | length 5.9
  Top Layer w0.2: R7_Digit_3.2@93.9,85.8 R7_Digit_3.2@93.646,85.8 93.1,85.8 Csh34_Digit_3.2@92.1,84.8 Csh34_Digit_3.2@92.1,84.546 92.1,84.4 93,83.5 93.5,83 R2_Digit_3.1@94.546,83 R2_Digit_3.1@94.8,83
NetCsh35_Digit_1_2: Csh35_Digit_1.2 R3_Digit_1.1 R9_Digit_1.2 | length 4.6
  Top Layer w0.2: Csh35_Digit_1.2@92.1,158.8 93.1,159.8 93.5,159.8 94.8,159.8 ; R9_Digit_1.2@94.8,159.2 94.8,159.8 ; R3_Digit_1.1@94.8,160.7 R3_Digit_1.1@94.8,160.344 94.8,159.8
NetCsh35_Digit_2_2: Csh35_Digit_2.2 R3_Digit_2.1 R9_Digit_2.2 | length 4.6
  Top Layer w0.2: Csh35_Digit_2.2@92.1,102 93.1,103 93.5,103 94.8,103 ; R9_Digit_2.2@94.8,102.4 94.8,103 ; R3_Digit_2.1@94.8,103.9 R3_Digit_2.1@94.8,103.544 94.8,103
NetCsh35_Digit_3_2: Csh35_Digit_3.2 R3_Digit_3.1 R9_Digit_3.2 | length 4.6
  Top Layer w0.2: Csh35_Digit_3.2@92.1,79.3 93.1,80.3 94.8,80.3 ; R9_Digit_3.2@94.8,79.7 94.8,80.3 ; R3_Digit_3.1@94.8,81.2 94.8,80.3
NetCsh36_Digit_1_2: Csh36_Digit_1.2 R4_Digit_1.1 R11_Digit_1.2 | length 6.2
  Top Layer w0.2: R11_Digit_1.2@93.546,154.1 R11_Digit_1.2@93.8,154.1 93.1,154.1 Csh36_Digit_1.2@92.1,153.1 Csh36_Digit_1.2@92.1,152.846 92.1,152.7 93,151.8 93.8,151 R4_Digit_1.1@94.546,151 R4_Digit_1.1@94.8,151
NetCsh36_Digit_2_2: Csh36_Digit_2.2 R4_Digit_2.1 R11_Digit_2.2 | length 5.9
  Top Layer w0.2: R11_Digit_2.2@93.9,97.3 93.646,97.3 93.1,97.3 Csh36_Digit_2.2@92.1,96.3 Csh36_Digit_2.2@92.1,96.046 92.1,95.9 93,95 93.5,94.5 94.546,94.5 R4_Digit_2.1@94.8,94.5
NetCsh36_Digit_3_2: Csh36_Digit_3.2 R4_Digit_3.1 R11_Digit_3.2 | length 5.9
  Top Layer w0.2: R11_Digit_3.2@93.9,74.6 93.646,74.6 93.1,74.6 Csh36_Digit_3.2@92.1,73.6 Csh36_Digit_3.2@92.1,73.346 92.1,73.2 93,72.3 93.5,71.8 94.546,71.8 R4_Digit_3.1@94.8,71.8
NetCsup8_1: Csup8.1 Uref8.2
NetJEth1_3: JEth1.3 U8.19 | length 28.8
  Top Layer w0.2: U8.19@139.45,94.95 138.353,94.95 137.62,95.683 137.62,102.16 138.255,102.795 150.941,102.795 152.276,101.46 JEth1.3@157,101.46
NetJEth1_4: JEth1.4 U8.20 | length 27
  Top Layer w0.2: U8.20@139.45,95.45 138.631,95.45 138.128,95.953 138.128,101.652 138.636,102.16 150.56,102.16 152.28,100.44 JEth1.4@157,100.44
NetR5_Digit_1_1: R5_Digit_1.1 R13_Digit_1.1 U1_Digit_1.24 | length 4.6
  Top Layer w0.2: R5_Digit_1.1@96.6,170.4 98.1,170.4 99.25,169.25 U1_Digit_1.24@100.75,169.25
NetR5_Digit_2_1: R5_Digit_2.1 R13_Digit_2.1 U1_Digit_2.24 | length 4.6
  Top Layer w0.2: R5_Digit_2.1@96.6,147.6 98.1,147.6 99.25,146.45 U1_Digit_2.24@100.75,146.45
NetR5_Digit_3_1: R5_Digit_3.1 R13_Digit_3.1 U1_Digit_3.24 | length 3.1
  Top Layer w0.2: R13_Digit_3.1@98.1,90.9 99.25,89.75 U1_Digit_3.24@100.75,89.75
NetR6_Digit_1_1: R6_Digit_1.1 R14_Digit_1.2 U1_Digit_1.1 | length 6.2
  Top Layer w0.2: R14_Digit_1.2@94.8,167.9 94.8,168.2 R6_Digit_1.1@95.7,169.1 ; R6_Digit_1.1@95.6,169.1 98.6,169.1 99.2,168.5 U1_Digit_1.1@100,168.5
NetR6_Digit_2_1: R6_Digit_2.1 R14_Digit_2.2 U1_Digit_2.1 | length 6.2
  Top Layer w0.2: R14_Digit_2.2@94.8,145.1 94.8,145.4 R6_Digit_2.1@95.7,146.3 ; R6_Digit_2.1@95.6,146.3 98.6,146.3 99.2,145.7 U1_Digit_2.1@100,145.7
NetR6_Digit_3_1: R6_Digit_3.1 R14_Digit_3.2 U1_Digit_3.1 | length 6.2
  Top Layer w0.2: R14_Digit_3.2@94.8,88.4 94.8,88.7 R6_Digit_3.1@95.7,89.6 ; R6_Digit_3.1@95.6,89.6 98.6,89.6 99.2,89 U1_Digit_3.1@100,89
NetR7_Digit_1_1: R7_Digit_1.1 R15_Digit_1.1 U1_Digit_1.6 | length 6.3
  Top Layer w0.2: R15_Digit_1.1@94.8,166.5 94.8,166.2 95.522,165.478 R7_Digit_1.1@95.7,165.3 ; R7_Digit_1.1@95.6,165.3 R7_Digit_1.1@95.7,165.3 ; U1_Digit_1.6@100,166 99.3,166 98.6,165.3 R7_Digit_1.1@95.954,165.3 R7_Digit_1.1@95.7,165.3
NetR7_Digit_2_1: R7_Digit_2.1 R15_Digit_2.1 U1_Digit_2.6 | length 6.3
  Top Layer w0.2: R15_Digit_2.1@94.8,143.7 94.8,143.4 95.522,142.678 R7_Digit_2.1@95.7,142.5 ; R7_Digit_2.1@95.6,142.5 98.6,142.5 99.3,143.2 U1_Digit_2.6@100,143.2
NetR7_Digit_3_1: R7_Digit_3.1 R15_Digit_3.1 U1_Digit_3.6 | length 6.2
  Top Layer w0.2: R15_Digit_3.1@94.8,87 94.8,86.7 R7_Digit_3.1@95.7,85.8 98.6,85.8 99.3,86.5 U1_Digit_3.6@100,86.5
NetR8_Digit_1_1: R8_Digit_1.1 R16_Digit_1.2 U1_Digit_1.7 | length 4.7
  Top Layer w0.2: R8_Digit_1.1@96.5,164 R16_Digit_1.2@98,164 ; R16_Digit_1.2@98.1,164 99.35,165.25 U1_Digit_1.7@100.75,165.25
NetR8_Digit_2_1: R8_Digit_2.1 R16_Digit_2.2 U1_Digit_2.7 | length 4.7
  Top Layer w0.2: R8_Digit_2.1@96.5,141.2 R16_Digit_2.2@98,141.2 ; R16_Digit_2.2@98.1,141.2 99.35,142.45 U1_Digit_2.7@100.75,142.45
NetR8_Digit_3_1: R8_Digit_3.1 R16_Digit_3.2 U1_Digit_3.7 | length 4.6
  Top Layer w0.2: R8_Digit_3.1@96.6,84.5 R16_Digit_3.2@97.746,84.5 R16_Digit_3.2@98,84.5 ; R16_Digit_3.2@98.1,84.5 99.35,85.75 U1_Digit_3.7@100.75,85.75
NetR9_Digit_1_1: R9_Digit_1.1 R17_Digit_1.1 U2_Digit_1.24 | length 4.6
  Top Layer w0.2: R9_Digit_1.1@96.6,159.2 98.1,159.2 99.25,158.05 U2_Digit_1.24@100.75,158.05
NetR9_Digit_2_1: R9_Digit_2.1 R17_Digit_2.1 U2_Digit_2.24 | length 4.6
  Top Layer w0.2: R9_Digit_2.1@96.6,102.4 98.1,102.4 99.25,101.25 U2_Digit_2.24@100.75,101.25
NetR9_Digit_3_1: R9_Digit_3.1 R17_Digit_3.1 U2_Digit_3.24 | length 4.6
  Top Layer w0.2: R9_Digit_3.1@96.6,79.7 98.1,79.7 99.25,78.55 U2_Digit_3.24@100.75,78.55
NetR10_Digit_1_1: R10_Digit_1.1 R18_Digit_1.2 U2_Digit_1.1 | length 6.2
  Top Layer w0.2: R18_Digit_1.2@94.8,156.7 94.8,157 R10_Digit_1.1@95.7,157.9 ; R10_Digit_1.1@95.6,157.9 98.6,157.9 99.2,157.3 U2_Digit_1.1@100,157.3
NetR10_Digit_2_1: R10_Digit_2.1 R18_Digit_2.2 U2_Digit_2.1 | length 6.2
  Top Layer w0.2: R18_Digit_2.2@94.8,99.9 94.8,100.2 R10_Digit_2.1@95.7,101.1 ; R10_Digit_2.1@95.6,101.1 98.6,101.1 99.2,100.5 U2_Digit_2.1@100,100.5
NetR10_Digit_3_1: R10_Digit_3.1 R18_Digit_3.2 U2_Digit_3.1 | length 6.1
  Top Layer w0.2: R18_Digit_3.2@94.8,77.2 94.8,77.5 R10_Digit_3.1@95.7,78.4 98.6,78.4 99.2,77.8 U2_Digit_3.1@100,77.8
NetR11_Digit_1_1: R11_Digit_1.1 R19_Digit_1.1 U2_Digit_1.6 | length 6.2
  Top Layer w0.2: R19_Digit_1.1@94.8,155.3 R19_Digit_1.1@94.8,154.944 94.8,154.9 R11_Digit_1.1@95.6,154.1 R11_Digit_1.1@95.854,154.1 98.6,154.1 99.3,154.8 U2_Digit_1.6@100,154.8
NetR11_Digit_2_1: R11_Digit_2.1 R19_Digit_2.1 U2_Digit_2.6 | length 6.3
  Top Layer w0.2: R19_Digit_2.1@94.8,98.5 94.8,98.2 95.522,97.478 R11_Digit_2.1@95.7,97.3 ; R11_Digit_2.1@95.6,97.3 98.6,97.3 99.3,98 U2_Digit_2.6@100,98
NetR11_Digit_3_1: R11_Digit_3.1 R19_Digit_3.1 U2_Digit_3.6 | length 6.3
  Top Layer w0.2: R19_Digit_3.1@94.8,75.8 94.8,75.5 95.522,74.778 R11_Digit_3.1@95.7,74.6 ; R11_Digit_3.1@95.6,74.6 98.6,74.6 99.3,75.3 U2_Digit_3.6@100,75.3
NetR12_Digit_1_1: R12_Digit_1.1 R20_Digit_1.2 U2_Digit_1.7 | length 4.7
  Top Layer w0.2: R12_Digit_1.1@96.5,152.8 R20_Digit_1.2@98,152.8 ; R20_Digit_1.2@98.1,152.8 99.35,154.05 U2_Digit_1.7@100.75,154.05
NetR12_Digit_2_1: R12_Digit_2.1 R20_Digit_2.2 U2_Digit_2.7 | length 4.7
  Top Layer w0.2: R12_Digit_2.1@96.5,96 R20_Digit_2.2@98,96 ; R20_Digit_2.2@98.1,96 99.35,97.25 U2_Digit_2.7@100.75,97.25
NetR12_Digit_3_1: R12_Digit_3.1 R20_Digit_3.2 U2_Digit_3.7 | length 4.8
  Top Layer w0.2: R12_Digit_3.1@96.5,73.3 R20_Digit_3.2@98,73.3 98.1,73.3 99.35,74.55 U2_Digit_3.7@100.75,74.55
NetR13_Digit_1_2: R13_Digit_1.2 U1_Digit_1.23 | length 1.9
  Top Layer w0.2: R13_Digit_1.2@99.8,170.4 100.8,170.4 101.25,169.95 U1_Digit_1.23@101.25,169.65
NetR13_Digit_2_2: R13_Digit_2.2 U1_Digit_2.23 | length 1.9
  Top Layer w0.2: R13_Digit_2.2@99.8,147.6 100.8,147.6 101.25,147.15 U1_Digit_2.23@101.25,146.85
NetR13_Digit_3_2: R13_Digit_3.2 U1_Digit_3.23 | length 1.9
  Top Layer w0.2: R13_Digit_3.2@99.8,90.9 100.8,90.9 101.25,90.45 U1_Digit_3.23@101.25,90.15
NetR14_Digit_1_1: R14_Digit_1.1 U1_Digit_1.2 | length 3.8
  Top Layer w0.2: R14_Digit_1.1@96.6,167.9 97.1,168.4 98.5,168.4 98.9,168 U1_Digit_1.2@100,168
NetR14_Digit_2_1: R14_Digit_2.1 U1_Digit_2.2 | length 3.8
  Top Layer w0.2: R14_Digit_2.1@96.6,145.1 97.1,145.6 98.5,145.6 98.9,145.2 U1_Digit_2.2@100,145.2
NetR14_Digit_3_1: R14_Digit_3.1 U1_Digit_3.2 | length 3.8
  Top Layer w0.2: R14_Digit_3.1@96.6,88.4 97.1,88.9 98.5,88.9 98.9,88.5 U1_Digit_3.2@100,88.5
NetR15_Digit_1_2: R15_Digit_1.2 U1_Digit_1.5 | length 3.7
  Top Layer w0.2: R15_Digit_1.2@96.6,166.5 97,166.1 98.5,166.1 98.9,166.5 U1_Digit_1.5@100,166.5
NetR15_Digit_2_2: R15_Digit_2.2 U1_Digit_2.5 | length 3.7
  Top Layer w0.2: R15_Digit_2.2@96.6,143.7 97,143.3 98.5,143.3 98.9,143.7 U1_Digit_2.5@100,143.7
NetR15_Digit_3_2: R15_Digit_3.2 U1_Digit_3.5 | length 3.7
  Top Layer w0.2: R15_Digit_3.2@96.6,87 97,86.6 98.5,86.6 98.9,87 U1_Digit_3.5@100,87
NetR16_Digit_1_1: R16_Digit_1.1 U1_Digit_1.8 | length 2.4
  Top Layer w0.2: R16_Digit_1.1@99.8,164 100.8,164 101.25,164.45 U1_Digit_1.8@101.25,165.25
NetR16_Digit_2_1: R16_Digit_2.1 U1_Digit_2.8 | length 2.4
  Top Layer w0.2: R16_Digit_2.1@99.8,141.2 100.8,141.2 101.25,141.65 U1_Digit_2.8@101.25,142.45
NetR16_Digit_3_1: R16_Digit_3.1 U1_Digit_3.8 | length 2.4
  Top Layer w0.2: R16_Digit_3.1@99.8,84.5 100.8,84.5 101.25,84.95 U1_Digit_3.8@101.25,85.75
NetR17_Digit_1_2: R17_Digit_1.2 U2_Digit_1.23 | length 1.9
  Top Layer w0.2: R17_Digit_1.2@99.8,159.2 100.8,159.2 101.25,158.75 U2_Digit_1.23@101.25,158.45
NetR17_Digit_2_2: R17_Digit_2.2 U2_Digit_2.23 | length 1.9
  Top Layer w0.2: R17_Digit_2.2@99.8,102.4 100.8,102.4 101.25,101.95 U2_Digit_2.23@101.25,101.65
NetR17_Digit_3_2: R17_Digit_3.2 U2_Digit_3.23 | length 1.9
  Top Layer w0.2: R17_Digit_3.2@99.8,79.7 100.8,79.7 101.25,79.25 U2_Digit_3.23@101.25,78.95
NetR18_Digit_1_1: R18_Digit_1.1 U2_Digit_1.2 | length 3.8
  Top Layer w0.2: R18_Digit_1.1@96.6,156.7 97.1,157.2 98.5,157.2 98.9,156.8 U2_Digit_1.2@100,156.8
NetR18_Digit_2_1: R18_Digit_2.1 U2_Digit_2.2 | length 3.8
  Top Layer w0.2: R18_Digit_2.1@96.6,99.9 97.1,100.4 98.5,100.4 98.9,100 U2_Digit_2.2@100,100
NetR18_Digit_3_1: R18_Digit_3.1 U2_Digit_3.2 | length 3.8
  Top Layer w0.2: R18_Digit_3.1@96.6,77.2 97.1,77.7 98.5,77.7 98.9,77.3 U2_Digit_3.2@100,77.3
NetR19_Digit_1_2: R19_Digit_1.2 U2_Digit_1.5 | length 3.7
  Top Layer w0.2: R19_Digit_1.2@96.6,155.3 97,154.9 98.5,154.9 98.9,155.3 U2_Digit_1.5@100,155.3
NetR19_Digit_2_2: R19_Digit_2.2 U2_Digit_2.5 | length 3.7
  Top Layer w0.2: R19_Digit_2.2@96.6,98.5 97,98.1 98.5,98.1 98.9,98.5 U2_Digit_2.5@100,98.5
NetR19_Digit_3_2: R19_Digit_3.2 U2_Digit_3.5 | length 3.7
  Top Layer w0.2: R19_Digit_3.2@96.6,75.8 97,75.4 98.5,75.4 98.9,75.8 U2_Digit_3.5@100,75.8
NetR20_Digit_1_1: R20_Digit_1.1 U2_Digit_1.8 | length 2.4
  Top Layer w0.2: R20_Digit_1.1@99.8,152.8 100.8,152.8 101.25,153.25 U2_Digit_1.8@101.25,154.05
NetR20_Digit_2_1: R20_Digit_2.1 U2_Digit_2.8 | length 2.4
  Top Layer w0.2: R20_Digit_2.1@99.8,96 100.8,96 101.25,96.45 U2_Digit_2.8@101.25,97.25
NetR20_Digit_3_1: R20_Digit_3.1 U2_Digit_3.8 | length 2.4
  Top Layer w0.2: R20_Digit_3.1@99.8,73.3 100.8,73.3 101.25,73.75 U2_Digit_3.8@101.25,74.55
NetR21_Digit_1_1: R21_Digit_1.1 U1_Digit_1.19 | length 3
  Top Layer w0.2: U1_Digit_1.19@103.25,169.25 105.1,171.1 R21_Digit_1.1@105.5,171.1
NetR21_Digit_2_1: R21_Digit_2.1 U1_Digit_2.19 | length 3
  Top Layer w0.2: U1_Digit_2.19@103.25,146.45 105.1,148.3 R21_Digit_2.1@105.5,148.3
NetR21_Digit_3_1: R21_Digit_3.1 U1_Digit_3.19 | length 3
  Top Layer w0.2: U1_Digit_3.19@103.25,89.75 105.1,91.6 R21_Digit_3.1@105.5,91.6
NetR22_Digit_1_1: R22_Digit_1.1 U1_Digit_1.18 | length 1.9
  Top Layer w0.2: U1_Digit_1.18@104,168.5 105,169.5 R22_Digit_1.1@105.5,169.5
NetR22_Digit_2_1: R22_Digit_2.1 U1_Digit_2.18 | length 1.9
  Top Layer w0.2: U1_Digit_2.18@104,145.7 105,146.7 R22_Digit_2.1@105.5,146.7
NetR22_Digit_3_1: R22_Digit_3.1 U1_Digit_3.18 | length 1.9
  Top Layer w0.2: U1_Digit_3.18@104,89 105,90 R22_Digit_3.1@105.5,90
NetR23_Digit_1_1: R23_Digit_1.1 U1_Digit_1.13 | length 1.5
  Top Layer w0.2: U1_Digit_1.13@104,166 R23_Digit_1.1@105.5,166
NetR23_Digit_2_1: R23_Digit_2.1 U1_Digit_2.13 | length 1.5
  Top Layer w0.2: U1_Digit_2.13@104,143.2 R23_Digit_2.1@105.5,143.2
NetR23_Digit_3_1: R23_Digit_3.1 U1_Digit_3.13 | length 1.5
  Top Layer w0.2: U1_Digit_3.13@104,86.5 R23_Digit_3.1@105.5,86.5
NetR24_Digit_1_1: R24_Digit_1.1 U1_Digit_1.12 | length 2.6
  Top Layer w0.2: U1_Digit_1.12@103.25,165.25 104,164.5 105.246,164.5 R24_Digit_1.1@105.5,164.5
NetR24_Digit_2_1: R24_Digit_2.1 U1_Digit_2.12 | length 2.6
  Top Layer w0.2: U1_Digit_2.12@103.25,142.45 104,141.7 105.246,141.7 R24_Digit_2.1@105.5,141.7
NetR24_Digit_3_1: R24_Digit_3.1 U1_Digit_3.12 | length 2.6
  Top Layer w0.2: U1_Digit_3.12@103.25,85.75 104,85 105.246,85 R24_Digit_3.1@105.5,85
NetR25_Digit_1_1: R25_Digit_1.1 U2_Digit_1.19 | length 3
  Top Layer w0.2: U2_Digit_1.19@103.25,158.05 105.1,159.9 R25_Digit_1.1@105.5,159.9
NetR25_Digit_2_1: R25_Digit_2.1 U2_Digit_2.19 | length 3
  Top Layer w0.2: U2_Digit_2.19@103.25,101.25 105.1,103.1 R25_Digit_2.1@105.5,103.1
NetR25_Digit_3_1: R25_Digit_3.1 U2_Digit_3.19 | length 3
  Top Layer w0.2: U2_Digit_3.19@103.25,78.55 105.1,80.4 R25_Digit_3.1@105.5,80.4
NetR26_Digit_1_1: R26_Digit_1.1 U2_Digit_1.18 | length 1.9
  Top Layer w0.2: U2_Digit_1.18@104,157.3 105,158.3 R26_Digit_1.1@105.5,158.3
NetR26_Digit_2_1: R26_Digit_2.1 U2_Digit_2.18 | length 1.9
  Top Layer w0.2: U2_Digit_2.18@104,100.5 105,101.5 R26_Digit_2.1@105.5,101.5
NetR26_Digit_3_1: R26_Digit_3.1 U2_Digit_3.18 | length 1.9
  Top Layer w0.2: U2_Digit_3.18@104,77.8 105,78.8 R26_Digit_3.1@105.5,78.8
NetR27_Digit_1_1: R27_Digit_1.1 U2_Digit_1.13 | length 1.5
  Top Layer w0.2: U2_Digit_1.13@104,154.8 R27_Digit_1.1@105.5,154.8
NetR27_Digit_2_1: R27_Digit_2.1 U2_Digit_2.13 | length 1.5
  Top Layer w0.2: U2_Digit_2.13@104,98 R27_Digit_2.1@105.5,98
NetR27_Digit_3_1: R27_Digit_3.1 U2_Digit_3.13 | length 1.5
  Top Layer w0.2: U2_Digit_3.13@104,75.3 R27_Digit_3.1@105.5,75.3
NetR28_Digit_1_1: R28_Digit_1.1 U2_Digit_1.12 | length 2.6
  Top Layer w0.2: U2_Digit_1.12@103.25,154.05 104,153.3 105.246,153.3 R28_Digit_1.1@105.5,153.3
NetR28_Digit_2_1: R28_Digit_2.1 U2_Digit_2.12 | length 2.6
  Top Layer w0.2: U2_Digit_2.12@103.25,97.25 104,96.5 105.246,96.5 R28_Digit_2.1@105.5,96.5
NetR28_Digit_3_1: R28_Digit_3.1 U2_Digit_3.12 | length 2.6
  Top Layer w0.2: U2_Digit_3.12@103.25,74.55 104,73.8 105.246,73.8 R28_Digit_3.1@105.5,73.8
NetR47_1: R47.1 U8.17 | length 1.5
  Top Layer w0.2: R47.1@139.45,92.5 U8.17@139.45,93.95
NetR48_1: R48.1 U8.38 | length 38.2
  Top Layer w0.2: U8.38@135,103.4 135,105
  Top Layer w0.254: 135,105 139.5,109.5 R48.1@169.7,109.5
NetR48_2: R48.2 R52.1 VDLED4.ANOD | length 3.6
  Top Layer w0.2: R48.2@169.7,111.3 R52.1@171.2,111.3 171.9,112 VDLED4.ANOD@173,112
NetR49_1: R49.1 U8.37 | length 14.8
  Top Layer w0.2: U8.37@135.5,103.4 135.5,104.5 136.5,105.5 142.5,105.5 144,104 R49.1@148.2,104
NetR50_1: R50.1 U8.36 | length 22.5
  Top Layer w0.2: v5(136,100.4) U8.36@136,103.4 ; R50.1@146.2,89 v5(146.2,91.4)
  Bottom Layer w0.2: v5(136,100.4) 136.8,100.4 138.7,98.5 144.5,98.5 145.5,97.5 145.5,92.1 v5(146.2,91.4)
NetRFL2_2: RFL2.2 UFL2.8
NetRFL3_1: RFL3.1 UFL1.3 | length 1.8
  Top Layer w0.254: UFL1.3@134.5,164 v6(136.284,164)
NetRFL5_1: RFL5.1 UFL1.18 | length 2.4
  Top Layer w0.254: UFL1.18@134.5,156.5 136.669,156.5 v6(136.805,156.364)
NetRref1_1: Rref1.1 Rref2.2 Uref8.1
NetRsh5_Digit_1_2: Rsh5_Digit_1.2 Rsh13_Digit_1.1 Ush1_Digit_1.3 | length 4.1
  Top Layer w0.2: Rsh5_Digit_1.2@72.8,169.3 72.8,169.6 v2(73.5,170.3) 74.3,169.5 Rsh13_Digit_1.1@74.8,169.5
  Bottom Layer w0.2: v2(73.5,170.3) 73.85,169.95 Ush1_Digit_1.3@74.5,169.95
NetRsh5_Digit_2_2: Rsh5_Digit_2.2 Rsh13_Digit_2.1 Ush1_Digit_2.3 | length 4.1
  Top Layer w0.2: Rsh5_Digit_2.2@72.8,146.5 72.8,146.8 v2(73.5,147.5) 74.3,146.7 Rsh13_Digit_2.1@74.8,146.7
  Bottom Layer w0.2: v2(73.5,147.5) 73.85,147.15 Ush1_Digit_2.3@74.5,147.15
NetRsh5_Digit_3_2: Rsh5_Digit_3.2 Rsh13_Digit_3.1 Ush1_Digit_3.3 | length 3.8
  Top Layer w0.2: Rsh5_Digit_3.2@72.8,90.1 v2(73.5,90.8) 74.3,90 Rsh13_Digit_3.1@74.8,90
  Bottom Layer w0.2: v2(73.5,90.8) 73.85,90.45 Ush1_Digit_3.3@74.5,90.45
NetRsh6_Digit_1_2: Rsh6_Digit_1.2 Rsh21_Digit_1.1 Ush1_Digit_1.4 | length 3.5
  Top Layer w0.2: Rsh6_Digit_1.2@72.8,172.5 72.8,172.2 v2(73.5,171.5) Rsh21_Digit_1.1@74.2,172.2
  Bottom Layer w0.2: v2(73.5,171.5) 74.1,172.1 Ush1_Digit_1.4@74.5,172.1
NetRsh6_Digit_2_2: Rsh6_Digit_2.2 Rsh21_Digit_2.1 Ush1_Digit_2.4 | length 3.5
  Top Layer w0.2: Rsh6_Digit_2.2@72.8,149.7 72.8,149.4 v2(73.5,148.7) Rsh21_Digit_2.1@74.2,149.4
  Bottom Layer w0.2: v2(73.5,148.7) 74.1,149.3 Ush1_Digit_2.4@74.5,149.3
NetRsh6_Digit_3_2: Rsh6_Digit_3.2 Rsh21_Digit_3.1 Ush1_Digit_3.4 | length 3.2
  Top Layer w0.2: Rsh6_Digit_3.2@72.8,92.7 v2(73.5,92) Rsh21_Digit_3.1@74.2,92.7
  Bottom Layer w0.2: v2(73.5,92) 74.1,92.6 Ush1_Digit_3.4@74.5,92.6
NetRsh7_Digit_1_2: Rsh7_Digit_1.2 Rsh14_Digit_1.1 Ush2_Digit_1.3 | length 4.1
  Top Layer w0.2: Rsh7_Digit_1.2@72.8,163.6 72.8,163.9 v2(73.5,164.6) 74.3,163.8 Rsh14_Digit_1.1@74.8,163.8
  Bottom Layer w0.2: v2(73.5,164.6) 73.85,164.25 Ush2_Digit_1.3@74.5,164.25
NetRsh7_Digit_2_2: Rsh7_Digit_2.2 Rsh14_Digit_2.1 Ush2_Digit_2.3 | length 4.1
  Top Layer w0.2: Rsh7_Digit_2.2@72.8,140.8 72.8,141.1 v2(73.5,141.8) 74.3,141 Rsh14_Digit_2.1@74.8,141
  Bottom Layer w0.2: v2(73.5,141.8) 73.85,141.45 Ush2_Digit_2.3@74.5,141.45
NetRsh7_Digit_3_2: Rsh7_Digit_3.2 Rsh14_Digit_3.1 Ush2_Digit_3.3 | length 3.8
  Top Layer w0.2: Rsh7_Digit_3.2@72.8,84.4 v2(73.5,85.1) 74.3,84.3 Rsh14_Digit_3.1@74.8,84.3
  Bottom Layer w0.2: v2(73.5,85.1) 73.85,84.75 Ush2_Digit_3.3@74.5,84.75
NetRsh8_Digit_1_2: Rsh8_Digit_1.2 Rsh22_Digit_1.1 Ush2_Digit_1.4 | length 3.5
  Top Layer w0.2: Rsh8_Digit_1.2@72.8,166.8 72.8,166.5 v2(73.5,165.8) Rsh22_Digit_1.1@74.2,166.5
  Bottom Layer w0.2: v2(73.5,165.8) 74.1,166.4 Ush2_Digit_1.4@74.5,166.4
NetRsh8_Digit_2_2: Rsh8_Digit_2.2 Rsh22_Digit_2.1 Ush2_Digit_2.4 | length 3.5
  Top Layer w0.2: Rsh8_Digit_2.2@72.8,144 72.8,143.7 v2(73.5,143) Rsh22_Digit_2.1@74.2,143.7
  Bottom Layer w0.2: v2(73.5,143) 74.1,143.6 Ush2_Digit_2.4@74.5,143.6
NetRsh8_Digit_3_2: Rsh8_Digit_3.2 Rsh22_Digit_3.1 Ush2_Digit_3.4 | length 3.2
  Top Layer w0.2: Rsh8_Digit_3.2@72.8,87 v2(73.5,86.3) Rsh22_Digit_3.1@74.2,87
  Bottom Layer w0.2: v2(73.5,86.3) 74.1,86.9 Ush2_Digit_3.4@74.5,86.9
NetRsh9_Digit_1_2: Rsh9_Digit_1.2 Rsh15_Digit_1.1 Ush3_Digit_1.3 | length 4.1
  Top Layer w0.2: Rsh9_Digit_1.2@72.8,158.1 72.8,158.4 v2(73.5,159.1) 74.3,158.3 Rsh15_Digit_1.1@74.8,158.3
  Bottom Layer w0.2: v2(73.5,159.1) 73.85,158.75 Ush3_Digit_1.3@74.5,158.75
NetRsh9_Digit_2_2: Rsh9_Digit_2.2 Rsh15_Digit_2.1 Ush3_Digit_2.3 | length 4.1
  Top Layer w0.2: Rsh9_Digit_2.2@72.8,101.3 72.8,101.6 v2(73.5,102.3) 74.3,101.5 Rsh15_Digit_2.1@74.8,101.5
  Bottom Layer w0.2: v2(73.5,102.3) 73.85,101.95 Ush3_Digit_2.3@74.5,101.95
NetRsh9_Digit_3_2: Rsh9_Digit_3.2 Rsh15_Digit_3.1 Ush3_Digit_3.3 | length 3.8
  Top Layer w0.2: Rsh9_Digit_3.2@72.8,78.9 v2(73.5,79.6) 74.3,78.8 Rsh15_Digit_3.1@74.8,78.8
  Bottom Layer w0.2: v2(73.5,79.6) 73.85,79.25 Ush3_Digit_3.3@74.5,79.25